# Altium PCB PCB2.PcbDoc
Units mm, origin at the board's own origin, x right, y up, seen from the top; angles counter-clockwise.
Board outline 200 x 200 mm, 2 copper layers (Top Layer, Bottom Layer); 133 components, 113 nets, 472 pads, 0 vias.
Unrouted connection lines stored in the file: 316.
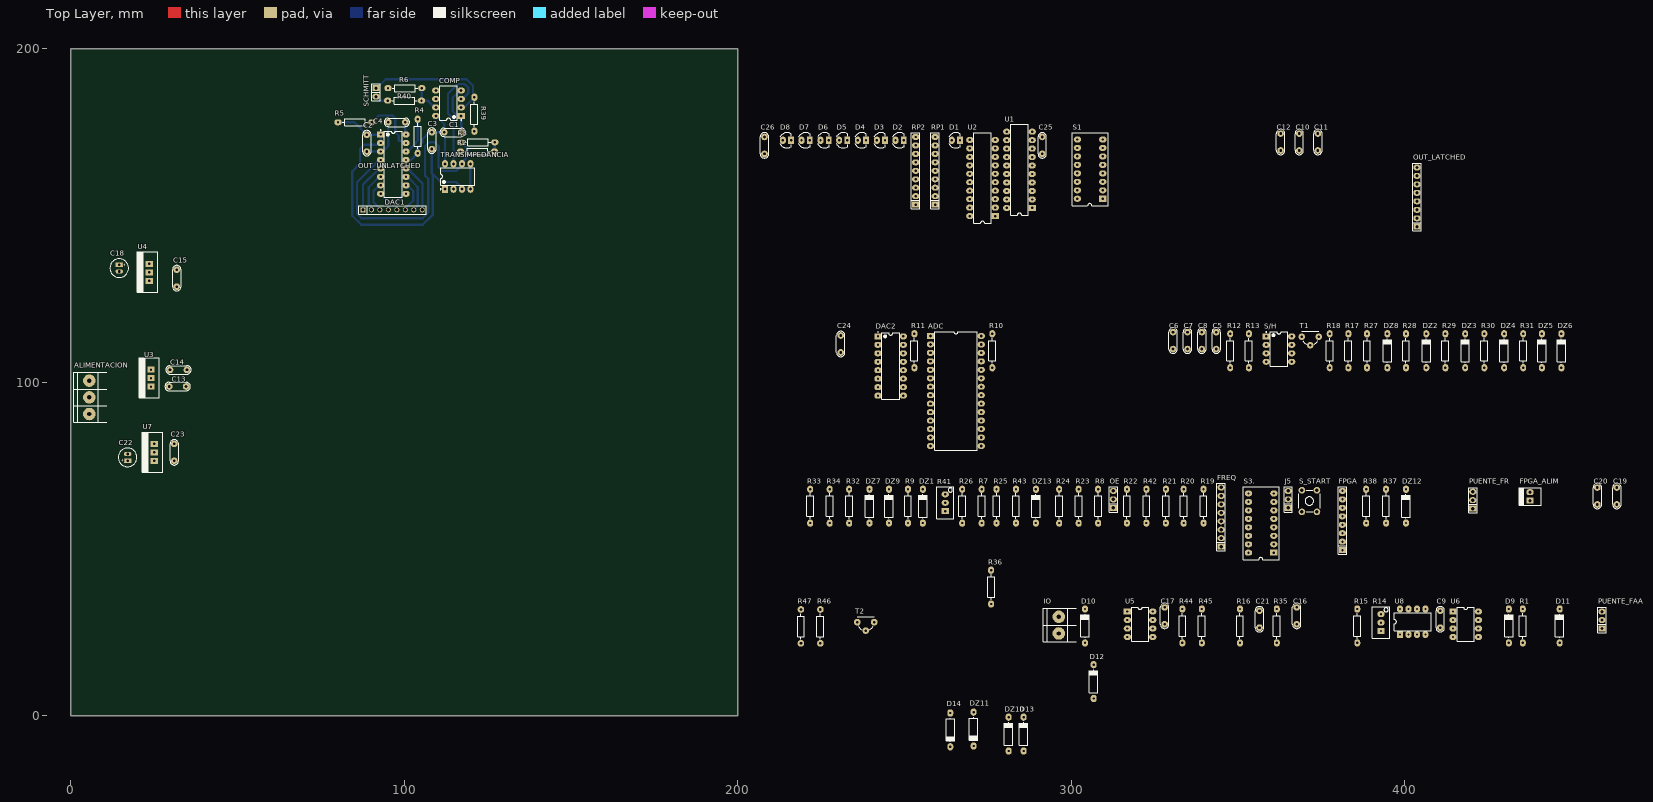
[diagram p0: Top Layer view]
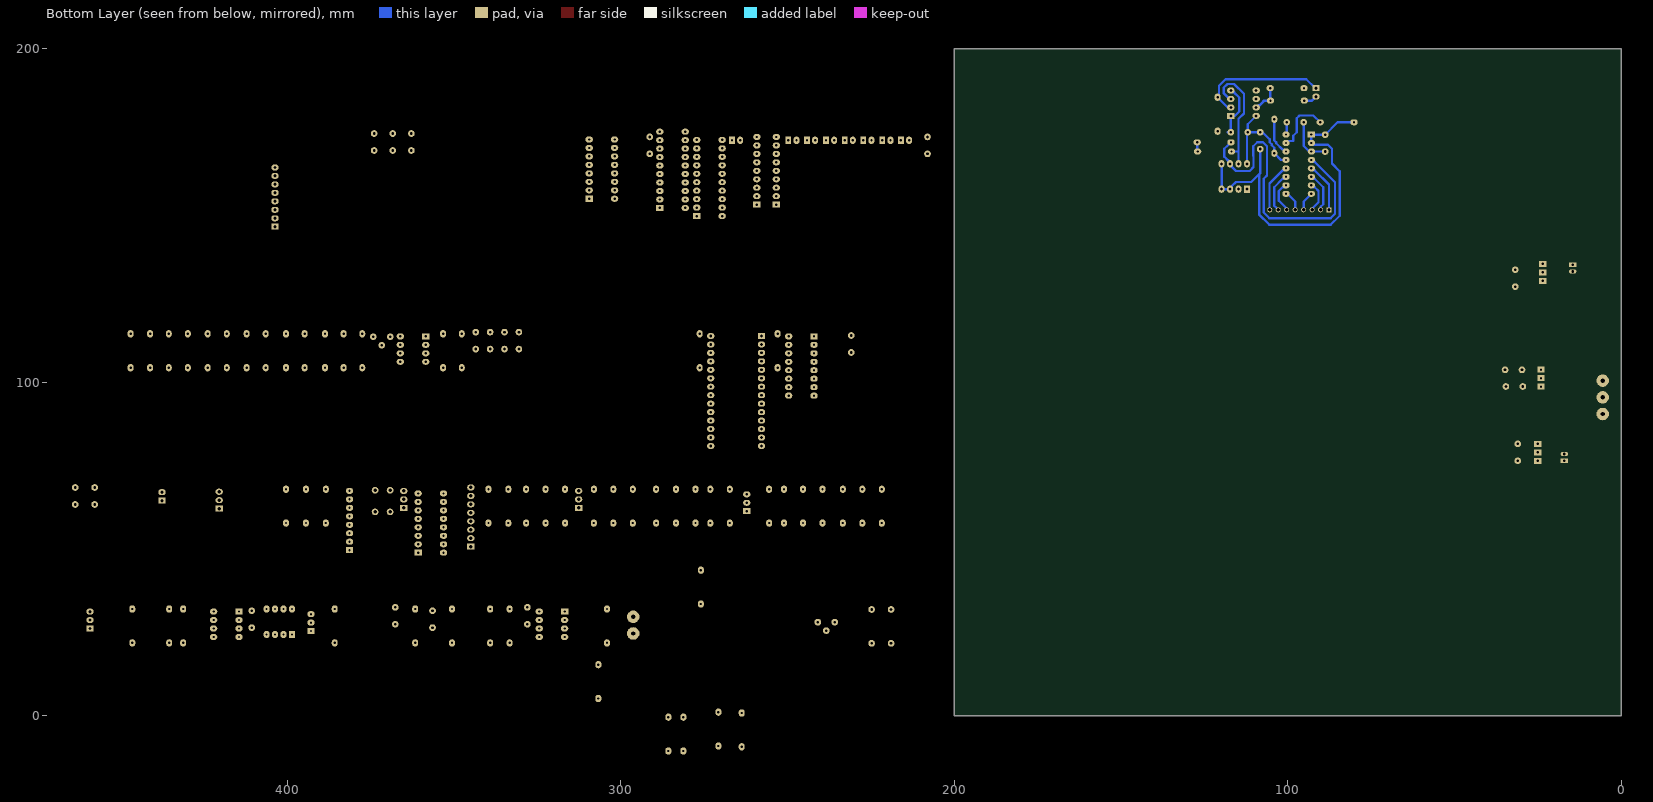
[diagram p1: Bottom Layer view, seen from below]

## Layer stack, top to bottom
Top Solder: solder mask 0.0102, Solder Resist, Dk 3.5
Top Layer: signal copper 0.0356
Dielectric 1: dielectric 0.32, FR-4, Dk 4.8
Bottom Layer: signal copper 0.0356
Bottom Solder: solder mask 0.0102, Solder Resist, Dk 3.5

## Board outline
0,0 0,200 200,200 200,0 0,0

## Design rules (kind name [scope] priority, off if disabled: settings)
Clearance [All] p1: gap=0.7 ignorepadtopadclearanceinfootprint=FALSE except(0: Arc-Hole Track-Hole SMDPad-Hole THPad-Hole Via-Hole Fill-Hole Poly-Hole Region-Hole Text-Hole)
PolygonConnect [All] p1: connectstyle=Relief reliefconductorwidth=0.254 reliefentries=4 polygonreliefangle="90 Angle" airgapwidth=0.254
RoutingVias [All] p1: holewidth=0.7 width=1.8 viastyle="Through Hole" minholewidth=0.7 minwidth=1.8 maxholewidth=0.7 maxwidth=1.8
SolderMaskExpansion [All] p1: expansion=0.102
Width [All] p1: maxlimit=0.7 minlimit=0.7 preferedwidth=0.7
30 further rules are at their usual default settings.

## Components (designator, comment, footprint, x,y, rotation, side; value= is the part's Value field where it differs from the comment)
ADC "ADC0808CCN" DIP28 257.81,113.919 r0 top
ALIMENTACION "BORNERA 3" BORNERA3 5.5,95.5 r0 top
C1 "100n" CAP200 114.5,175 r0 top
C2 "100n" CAP200 88.75,171.75 r270 top
C3 "100n" CAP200 108.25,172.5 r90 top
C4 "10n" CAP200 97.75,178 r0 top
C5 "100n" CAP200 343.535,112.522 r90 top
C6 "100n" CAP200 330.581,112.522 r90 top
C7 "100n" CAP200 334.899,112.522 r90 top
C8 "10n" CAP200 339.217,112.522 r90 top
C9 "CAP" CAP200 410.718,28.956 r90 top
C10 "10n" CAP200 368.427,172.085 r90 top
C11 "100n" CAP200 374.015,172.085 r90 top
C12 "100n" CAP200 362.839,172.085 r90 top
C13 "330n" CAP200 32,98.75 r0 top
C14 "100n" CAP200 32.25,103.75 r0 top
C15 "100n" CAP200 31.75,131.25 r90 top
C16 "100n" CAP200 367.665,29.972 r90 top
C17 "100n" CAP200 328.041,29.972 r90 top
C18 "10u" CAP100RP 14.5,134.25 r270 top
C19 "100n" CAP200 463.677,65.913 r90 top
C20 "100n" CAP200 457.835,65.913 r90 top
C21 "CAP" CAP200 356.489,28.956 r90 top
C22 "2.2u" CAP100RP 17,77.5 r90 top
C23 "1u" CAP200 31,79 r270 top
C24 "100n" CAP200 230.886,111.506 r90 top
C25 "CAP" CAP200 291.338,171.069 r90 top
C26 "CAP" CAP200 208.026,171.069 r90 top
COMP "LM311N" N08E#1 113.25,183.75 r180 top
D1 "LED" LED3 265.43,172.593 r0 top
D2 "LED" LED3 248.539,172.593 r0 top
D3 "LED" LED3 242.951,172.593 r0 top
D4 "LED" LED3 237.236,172.593 r0 top
D5 "LED" LED3 231.648,172.593 r0 top
D6 "LED" LED3 226.06,172.593 r0 top
D7 "LED" LED3 220.345,172.593 r0 top
D8 "LED" LED3 214.757,172.593 r0 top
D9 "DIODO" DO41 431.292,26.924 r90 top
D10 "DIODO" DO41 304.165,26.924 r90 top
D11 "DIODO" DO41 446.532,26.924 r90 top
D12 "DIODO" DO41 306.75,10.25 r90 top
D13 "DIODO" DO41 285.75,-5.5 r90 top
D14 "DIODO" DO41 263.75,-4.25 r270 top
DAC1 "DAC0800LCN" N16E 96.69,165.44 r0 top
DAC2 "DAC0800LCN" N16E 245.872,104.902 r0 top
DZ1 "3.3V" DO41 255.524,62.865 r90 top
DZ2 "3.6V" DO41 406.527,109.474 r90 top
DZ3 "3.6V" DO41 418.211,109.474 r90 top
DZ4 "3.6V" DO41 429.895,109.474 r90 top
DZ5 "3.6V" DO41 441.198,109.474 r90 top
DZ6 "3.6V" DO41 447.04,109.474 r90 top
DZ7 "3.6V" DO41 239.522,62.865 r90 top
DZ8 "3.6V" DO41 394.843,109.474 r90 top
DZ9 "3.6V" DO41 245.364,62.865 r90 top
DZ10 "5.6V" DO41 281.25,-5.5 r90 top
DZ11 "5.6V" DO41 270.75,-4 r270 top
DZ12 "3.6V" DO41 400.431,62.865 r90 top
DZ13 "3.6V" DO41 289.433,62.865 r90 top
FPGA "CON8" SIP8#1 381.381,49.657 r90 top
FPGA_ALIM "MOLEX2" MOLEX2 437.642,64.516 r90 top
FREQ "CON8" SIP8#2 345,50.71 r90 top
IO "BORNERA 2" BORNERA2 296.291,27.178 r0 top
J5 "SAR/MOD" JUMPER3 365.125,64.897 r90 top
OE "JUMPER" JUMPER3 312.674,64.897 r90 top
OUT_LATCHED "CON8" SIP8#2 403.75,146.67 r90 top
OUT_UNLATCHED "CON8" SIP8#3 87.59,151.75 r0 top
PUENTE_FAA "JUMPER" JUMPER3 459.232,28.702 r90 top
PUENTE_FR "JUMPER" JUMPER3 420.497,64.643 r90 top
R1 "4k7" RES400#1 435.483,21.844 r90 top
R2 "1K5" RES400#1 116.84,169.25 r0 top
R3 "1K" RES400#1 127.16,172 r180 top
R4 "5K" RES400#1 104,178.91 r270 top
R5 "5K" RES400#1 90.25,178 r180 top
R6 "1K" RES400#1 105.25,188.25 r180 top
R7 "560" RES400#1 273.177,57.785 r90 top
R8 "1K" RES400#1 308.102,57.785 r90 top
R9 "1K" RES400#1 251.079,57.785 r90 top
R10 "5K" RES400#1 276.352,104.394 r90 top
R11 "5K" RES400#1 252.984,104.394 r90 top
R12 "1K" RES400#1 347.726,104.394 r90 top
R13 "1k5" RES400#1 353.314,104.394 r90 top
R14 "10k" "PRESET V" 392.938,27.94 r90 top
R15 "4k7" RES400#1 385.826,21.844 r90 top
R16 "4k7" RES400#1 350.647,21.844 r90 top
R17 "2k2" RES400#1 383.159,104.394 r90 top
R18 "6k8" RES400#1 377.571,104.394 r90 top
R19 "10k" RES400#1 339.725,57.785 r90 top
R20 "10k" RES400#1 333.756,57.785 r90 top
R21 "10k" RES400#1 328.422,57.785 r90 top
R22 "10k" RES400#1 316.738,57.785 r90 top
R23 "10k" RES400#1 302.26,57.785 r90 top
R24 "10k" RES400#1 296.418,57.785 r90 top
R25 "10k" RES400#1 277.622,57.785 r90 top
R26 "10k" RES400#1 267.335,57.785 r90 top
R27 "22k" RES400#1 388.747,104.394 r90 top
R28 "22k" RES400#1 400.431,104.394 r90 top
R29 "22k" RES400#1 412.242,104.394 r90 top
R30 "22k" RES400#1 423.926,104.394 r90 top
R31 "22k" RES400#1 435.61,104.394 r90 top
R32 "22k" RES400#1 233.426,57.785 r90 top
R33 "22k" RES400#1 221.742,57.785 r90 top
R34 "22k" RES400#1 227.584,57.785 r90 top
R35 "10k" RES400#1 361.696,21.844 r90 top
R36 "10k" RES400#1 276,33.5 r90 top
R37 "20k" RES400#1 394.462,57.785 r90 top
R38 "10k" RES400#1 388.493,57.785 r90 top
R39 "TBD" RES400#1 121,175.34 r90 top
R40 "TBD" RES400#1 95,184.5 r0 top
R41 "PRESET" "PRESET V" 262.255,63.881 r90 top
R42 "10K" RES400#1 322.58,57.785 r90 top
R43 "20K" RES400#1 283.464,57.785 r90 top
R44 "4k7" RES400#1 333.375,21.844 r90 top
R45 "4k7" RES400#1 339.217,21.844 r90 top
R46 "2k2" RES400#2 224.79,21.717 r90 top
R47 "6k8" RES400#2 218.948,21.717 r90 top
RP1 "R-PACK 8+1" RESNET8+1 259.207,153.289 r90 top
RP2 "R-PACK 8+1" RESNET8+1 253.365,153.289 r90 top
S1 "SW-DIP8" DIP-16-KEY 309.499,155.067 r90 top
S3. "SW-DIP8" DIP-16-KEY 360.807,48.895 r90 top
S/H "LF398N" N08E#2 362.331,109.982 r0 top
S_START "TACT SWITCH" TACTSWITCH 371.475,64.389 r0 top
SCHMITT "JUMPER" JUMPER2 91.5,186.98 r270 top
T1 "TRANSISTOR NPN" TO92 371.729,112.395 r0 top
T2 "TRANSISTOR NPN" TO92 238.379,26.797 r0 top
TRANSIMPEDANCIA "LM358N" N08E#1 116,161.75 r90 top
U1 "SN74LS244N" 738-03 284.5,163.75 r90 top
U2 "MC74HC374N" 738-03 273.431,161.29 r90 top
U3 "7805" "TO-220 V" 24,101.25 r90 top
U4 "MC33269" "TO-220 V" 23.5,133 r90 top
U5 "MAX297CPA" DIP8 316.865,31.242 r0 top
U6 "MAX297CPA" DIP8 414.528,31.242 r0 top
U7 "7905" "TO-220 V" 25,79 r90 top
U8 "TL082ACJG" 693-02 402.463,28.194 r0 top

## Footprints (in the part's own frame and the unit in brackets; to place one, negate y for a bottom-side part, rotate by r counter-clockwise, add the part's x,y. Pads: shape width x height; smd on the part's side, far side on the other; paste and mask are expansions set on the pad)
693-02 [mm] "DIP; 8 Leads; Row Spacing 7.62 mm; Pitch 2.54 mm"
  rect 1.8x2.2 hole 0.7: 1(-3.81,-3.81)
  oval 1.8x2.2 hole 0.7: 2(-1.27,-3.81) 3(1.27,-3.81) 4(3.81,-3.81) 5(3.81,3.81) 6(1.27,3.81) 7(-1.27,3.81) 8(-3.81,3.81)
  silkscreen extent -5.5,-2.65 5.5,2.65
738-03 [mm] "DIP; 20 Leads; Row Spacing 7.62 mm; Pitch 2.54 mm"
  rect 1.8x2.2 hole 0.7: 1(-11.43,-3.81)
  oval 1.8x2.2 hole 0.7: 2(-8.89,-3.81) 3(-6.35,-3.81) 4(-3.81,-3.81) 5(-1.27,-3.81) 6(1.27,-3.81) 7(3.81,-3.81) 8(6.35,-3.81) 9(8.89,-3.81) 10(11.43,-3.81) 11(11.43,3.81) 12(8.89,3.81) 13(6.35,3.81) 14(3.81,3.81) 15(1.27,3.81) 16(-1.27,3.81) 17(-3.81,3.81) 18(-6.35,3.81) 19(-8.89,3.81) 20(-11.43,3.81)
  silkscreen extent -13.6,-2.65 13.6,2.65
BORNERA2 [mm] "Bornera con Tornillos 5mm separación"
  round 3.75 hole 1.3: 1(0,2.5) 2(0,-2.5)
  silkscreen extent -4.6,-5 5.2,5, body extent -3.76,-4.89 3.94,5.61, height 10
BORNERA3 [mm] "Bornera con Tornillos 5mm separación"
  round 3.75 hole 1.3: 1(0,5) 2(0,0) 3(0,-5)
  silkscreen extent -4.6,-7.5 5.2,7.5, body extent -3.76,-7.39 3.94,8.11, height 10.05
CAP100RP [mm] "Body diameter 5mm"
  rect 1.3x2.2 hole 0.762: 1(-1,0)
  oval 1.3x2.2 hole 0.762: 2(1,0)
  silkscreen extent -2.79,-2.79 2.79,2.79, body extent -2.53,-2.51 2.53,2.54, height 11.53
CAP200 [mm]
  round 2 hole 0.813: 1(-2.54,0) 2(2.54,0)
  silkscreen extent -3.81,-1.27 3.81,1.27, body extent -2.79,-1.17 2.79,1.12, height 6.24
DIP8 [mm]
  rect 2.2x1.8 hole 0.7: 1(0,0)
  oval 2.2x1.8 hole 0.7: 2(0,-2.54) 3(0,-5.08) 4(0,-7.62) 5(7.62,-7.62) 6(7.62,-5.08) 7(7.62,-2.54) 8(7.62,0)
  silkscreen extent 1.27,-8.89 6.35,1.27, body extent -0.06,-9.21 7.7,1.59, height 4.5
DIP28 [mm]
  rect 2.2x1.8 hole 0.813: 1(0,0)
  oval 2.2x1.8 hole 0.813: 2(0,-2.54) 3(0,-5.08) 4(0,-7.62) 5(0,-10.16) 6(0,-12.7) 7(0,-15.24) 8(0,-17.78) 9(0,-20.32) 10(0,-22.86) 11(0,-25.4) 12(0,-27.94) 13(0,-30.48) 14(0,-33.02) 15(15.24,-33.02) 16(15.24,-30.48) 17(15.24,-27.94) 18(15.24,-25.4) 19(15.24,-22.86) 20(15.24,-20.32) 21(15.24,-17.78) 22(15.24,-15.24) 23(15.24,-12.7) 24(15.24,-10.16) 25(15.24,-7.62) 26(15.24,-5.08) 27(15.24,-2.54) 28(15.24,0)
  silkscreen extent 1.27,-34.29 13.97,1.27, body extent -0.19,-34.54 15.43,1.47, height 4.66
DIP-16-KEY [mm] "DIP; 16 Leads; Row Spacing 7.62 mm; Pitch 2.54 mm"
  rect 1.8x2.2 hole 0.7: 1(0,0)
  oval 1.8x2.2 hole 0.7: 2(2.54,0) 3(5.08,0) 4(7.62,0) 5(10.16,0) 6(12.7,0) 7(15.24,0) 8(17.78,0) 9(17.78,7.62) 10(15.24,7.62) 11(12.7,7.62) 12(10.16,7.62) 13(7.62,7.62) 14(5.08,7.62) 15(2.54,7.62) 16(0,7.62)
  silkscreen extent -2.05,-1.59 19.83,9.2
DO41 [mm]
  oval 2.2x1.8 hole 0.7: 1(-5.08,0) 2(5.08,0)
  silkscreen extent -3.56,-1.27 3.56,1.27, body extent -5.46,-1.19 5.46,1.37, height 2.03
JUMPER2 [mm]
  rect 1.8x2.2 hole 1.016: 1(-1.27,0)
  oval 1.8x2.2 hole 1.016: 2(1.27,0)
  silkscreen extent -2.54,-1.27 2.54,1.27, body extent -2.46,-1.27 2.54,1.27, height 9.5
JUMPER3 [mm]
  rect 1.8x2.2 hole 1.016: 1(-2.54,0)
  oval 1.8x2.2 hole 1.016: 2(0,0) 3(2.54,0)
  silkscreen extent -3.81,-1.27 3.81,1.27, body extent -3.81,-1.3 3.81,1.27, height 16.15
LED3 [mm]
  oval 1.8x2.2 hole 0.7: 1(-1.219,0)
  rect 1.7x2.2 hole 0.7: 2(1.245,0)
  silkscreen extent -2.13,-2.3 1.36,2.3, body extent -1.65,-1.63 1.65,1.66, height 0.49
MOLEX2 [mm]
  rect 1.8x2.2 hole 1.016: 1(0,0)
  oval 1.8x2.2 hole 1.016: 2(2.54,0)
  silkscreen extent -1.4,-3.3 3.94,3.3, body extent -1.27,-3.17 3.81,3.18, height 10.74
N08E#1 [mm] "DIP, 8-Leads, Row Spacing 7.62mm, Pitch 2.54mm, Body 9.91x6.35mm"
  rect 2.2x1.8 hole 0.9: 1(-3.81,3.81)
  oval 2.2x1.8 hole 0.9: 2(-3.81,1.27) 3(-3.81,-1.27) 4(-3.81,-3.81) 5(3.81,-3.81) 6(3.81,-1.27) 7(3.81,1.27) 8(3.81,3.81)
  silkscreen extent -3.94,-5.15 2.65,5.23, body extent -3.6,-5.15 3.6,5.15, height 5.34
N08E#2 [mm] "DIP, 8-Leads, Row Spacing 7.62mm, Pitch 2.54mm, Body 9.91x6.35mm"
  rect 2.2x1.8 hole 0.7: 1(-3.81,3.81)
  oval 2.2x1.8 hole 0.7: 2(-3.81,1.27) 3(-3.81,-1.27) 4(-3.81,-3.81) 5(3.81,-3.81) 6(3.81,-1.27) 7(3.81,1.27) 8(3.81,3.81)
  silkscreen extent -3.93,-5.15 2.65,5.23, body extent -3.6,-5.15 3.6,5.15, height 5.34
N16E [mm] "DIP, 16-Leads, Row Spacing 7.62mm, Pitch 2.54mm, Body 19.3x6.35mm"
  rect 2.2x1.8 hole 0.7: 1(-3.81,8.89)
  oval 2.2x1.8 hole 0.7: 2(-3.81,6.35) 3(-3.81,3.81) 4(-3.81,1.27) 5(-3.81,-1.27) 6(-3.81,-3.81) 7(-3.81,-6.35) 8(-3.81,-8.89) 9(3.81,-8.89) 10(3.81,-6.35) 11(3.81,-3.81) 12(3.81,-1.27) 13(3.81,1.27) 14(3.81,3.81) 15(3.81,6.35) 16(3.81,8.89)
  silkscreen extent -3.93,-9.9 2.65,10.31, body extent -3.3,-9.9 3.3,9.9, height 4.32
"PRESET V" [mm]
  rect 1.8x2.2 hole 0.7: 1(-2.54,0)
  oval 1.8x2.2 hole 0.7: 2(0,0) 3(2.54,0)
  silkscreen extent -4.76,-2.6 4.76,2.6, body extent -4.7,-2.42 4.83,2.42, height 11.55
RES400#1 [mm]
  oval 2.2x1.8 hole 0.7: 1(0,0) 2(10.16,0)
  silkscreen extent 1.27,-1.02 8.89,1.02, body extent -0.3,-1.14 10.46,1.17, height 2.43
RES400#2 [mm]
  round 2 hole 0.813: 1(0,0) 2(10.16,0)
  silkscreen extent 1.27,-1.02 8.89,1.02, body extent -0.3,-1.14 10.46,1.17, height 2.43
RESNET8+1 [mm]
  rect 1.8x2.2 hole 0.7: 1(0,0)
  oval 1.8x2.2 hole 0.7: 2(2.54,0) 3(5.08,0) 4(7.62,0) 5(10.16,0) 6(12.7,0) 7(15.24,0) 8(17.78,0) 9(20.32,0)
  silkscreen extent -1.27,-1.27 21.59,1.27, body extent -1.09,-0.64 21.41,0.62, height 5.3
SIP8#1 [mm]
  rect 1.8x2.2 hole 0.7: 1(0,0)
  oval 1.8x2.2 hole 0.7: 2(2.54,0) 3(5.08,0) 4(7.62,0) 5(10.16,0) 6(12.7,0) 7(15.24,0) 8(17.78,0)
  silkscreen extent -1.27,-1.27 19.05,1.27, body extent -1.27,-1.27 19.05,1.27, height 8.38
SIP8#2 [mm]
  rect 1.8x2.2 hole 1.016: 1(0,0)
  oval 1.8x2.2 hole 1.016: 2(2.54,0) 3(5.08,0) 4(7.62,0) 5(10.16,0) 6(12.7,0) 7(15.24,0) 8(17.78,0)
  silkscreen extent -1.27,-1.27 19.05,1.27, body extent -1.27,-1.27 19.05,1.27, height 8.38
SIP8#3 [mm]
  rect 1.5x1.5 hole 1.016: 1(0,0)
  round 1.5 hole 1.016: 2(2.54,0) 3(5.08,0) 4(7.62,0) 5(10.16,0) 6(12.7,0) 7(15.24,0) 8(17.78,0)
  silkscreen extent -1.27,-1.27 19.05,1.27, body extent -1.27,-1.27 19.05,1.27, height 8.38
TACTSWITCH [mm]
  round 2 hole 1.016: 1(-2.25,-3.25) 2(-2.25,3.25) 3(2.25,-3.25) 4(2.25,3.25)
  silkscreen extent -3.25,-3.25 3.25,3.25, body extent -3.05,-3.95 3.15,3.95, height 7
TO92 [mm]
  round 2 hole 0.813: 1(0,-1.27) 2(2.54,1.27) 3(-2.54,1.27)
  silkscreen extent -2.54,-1 2.54,2.92, body extent -2.79,-1.55 2.79,2.79, height 8
"TO-220 V" [mm]
  rect 1.8x2.2 hole 0.7: 1(-2.54,0) 2(0,0) 3(2.54,0)
  silkscreen extent -5.9,-2.54 6.1,3.54, body extent -5,-2 5,3, height 18

## Part data
ADC: "28 pin 8-bit Microprocessor Compatible A/D Converters With 8-Channel Multiplexer 13 per tube"
C1 C2 C3 C4 C5 C6 C7 C8 C10 C11 C12 C13 C14 C15 C16 C17 C19 C20 C23 C24: library part CAP
C18 C22: library part CAPPOL
COMP: "Voltage Comparator, 8-pin MDIP"
DAC1 DAC2: "8-Bit D/A Converter, 16-pin MDIP"
DZ1 DZ2 DZ3 DZ4 DZ5 DZ6 DZ7 DZ8 DZ9 DZ10 DZ11 DZ12 DZ13: library part "DIODO ZENER"
J5 OE PUENTE_FAA PUENTE_FR: library part JUMPER3
R1 R2 R3 R4 R5 R6 R7 R8 R9 R10 R11 R12 R13 R15 R16 R17 R18 R19 R20 R21 R22 R23 R24 R25 R26 R27 R28 R29 R30 R31 R32 R33 R34 R35 R36 R37 R38 R39 R40 R42 R43 R44 R45 R46 R47: library part RES
R14: library part PRESET
S1 S3.: "4009 Series DIP Switch, Raised actuator"
S/H: "Monolithic Sample and Hold Circuits, 8-pin MDIP"
TRANSIMPEDANCIA: "Low Power Dual Operational Amplifier, 8-pin MDIP"
U1: "Octal Buffer/Line Driver with 3-State Outputs"
U2: "Octal 3-State Non-Inverting D-Type Flip-Flop"
U3 U4: library part 78XX, "REGULDOR POSITIVO"
U5 U6: "Active Filter Single SW-CAP Low Pass 8th Order 50kHz 8-Pin PDIP N"
U7: library part 79XX, "REGULADOR NEGATIVO"
U8: "JFET-Input Operational Amplifier"

## Nets (pads, with @x,y where several pads share a name; then routed paths per layer and width w, separated by ;. In a path a pad name is that pad's centre, name@x,y a point inside that pad or via, vN(x,y) a via of type N, cw(c..) or ccw(c..) an arc to the next point about the centre after c; other vN are vias at no path point)
B0: DAC2.5 DAC2.12 RP1.2 RP1.9 S1.9 S1.16 U1.2 U1.17
B1: DAC2.11 RP1.3 S1.10 U1.15
B2: DAC2.10 RP1.4 S1.11 U1.13
B3: DAC2.9 RP1.5 S1.12 U1.11
B4: DAC2.8 RP1.6 S1.13 U1.8
B5: DAC2.7 RP1.7 S1.14 U1.6
B6: DAC2.6 RP1.8 S1.15 U1.4
CLK_9FS: FPGA.6 T1.3
CLK_DAC: ADC.10 R18.1 T1.2
CLK_FILTRO: FPGA.7 T2.3
FPGA_OE: DZ1.2 R7.1 R38.1 U2.1
FR_IN: D10.2 D12.1 PUENTE_FR.1 R13.2 TRANSIMPEDANCIA.1 U5.8
GND: ADC.1 ADC.2 ADC.3 ADC.4 ADC.5 ADC.13 ADC.16 ADC.23 ADC.24 ADC.25 ADC.27 ADC.28 ALIMENTACION.2 C1.2 C2.1 C3.1 C5.2 C6.2 C7.2 C8.2 C9.2 C11.1 C12.1 C13.2 C14.2 C15.2 C16.2 C17.1 C18.2 C19.2 C20.2 C21.2 C22.1 C23.2 C24.2 C25.1 C26.2 COMP.1 COMP.4 D9.1 D10.1 D13.1 D14.2 DAC1.1 DAC1.2 DAC2.1 DAC2.2 DZ1.1 DZ2.1 DZ3.1 DZ4.1 DZ5.1 DZ6.1 DZ7.1 DZ8.1 DZ9.1 DZ10.1 DZ11.2 DZ12.1 DZ13.1 FPGA_ALIM.2 J5.1 R5.2 R8.1 R9.1 R11.1 R16.2 R27.1 R28.1 R29.1 R30.1 R31.1 R32.1 R33.1 R34.1 R35.1 R36.1 R37.2 R41.1 R43.1 R45.2 RP1.1 RP2.1 S/H.7 TRANSIMPEDANCIA.3 TRANSIMPEDANCIA.4 TRANSIMPEDANCIA.5 U1.1 U1.10 U1.19 U2.10 U3.2 U4.2 U5.6 U6.6 U7.1 | length 129.9
  Bottom Layer w0.7: R5.2 85.04,178 C2.1 92.84,174.29 DAC1.1 DAC1.2 92.29,171.2 92.29,171.26 87.901,171.26 86.7,170.059 86.7,165.61 84.42,163.33 84.39,163.36 84.39,149.985 87.125,147.25 105.48,147.25 108.57,150.34 108.57,161.66 108.5,161.73 108.5,162.5 ; C3.1 108.25,162.75 108.5,162.5 ; COMP.4 116.47,186.97 116.052,186.97 114.5,185.418 114.5,181.25 115.81,179.94 COMP.1 117.04,179.92 C1.2 C1.2@118,175 ; TRANSIMPEDANCIA.5 TRANSIMPEDANCIA.4 TRANSIMPEDANCIA.3 117.27,158.358 116.852,157.94 116.68,157.94 116.68,158.948 115.538,160.09 110.91,160.09 108.5,162.5
NetADC_8: ADC.8 U2.13
NetADC_14: ADC.14 U2.17
NetADC_15: ADC.15 U2.14
NetADC_17: ADC.17 U2.18
NetADC_18: ADC.18 U2.8
NetADC_19: ADC.19 U2.7
NetADC_20: ADC.20 U2.4
NetADC_21: ADC.21 U2.3
NetC4_2: C4.2 DAC1.16 | length 3.8
  Bottom Layer w0.7: C4.2 100.29,174.54 DAC1.16
NetC8_1: C8.1 S/H.6
NetC10_1: C10.1 DAC2.16
NetCOMP_2: COMP.2 R39.2 SCHMITT.1 | length 39.9
  Bottom Layer w0.7: SCHMITT.1 91.75,188.25 94.41,190.91 118.648,190.91 120.61,188.948 120.61,185.89 R39.2 117.98,182.48 COMP.2 COMP.2@117.08,182.5
NetCOMP_3: COMP.3 R2.1 TRANSIMPEDANCIA.7 | length 36.6
  Bottom Layer w0.7: TRANSIMPEDANCIA.7@114.73,165.02 TRANSIMPEDANCIA.7 114.73,169.25 ; R2.1 114.73,169.25 ; COMP.3 117.478,185.02 119.21,186.752 119.21,188.368 118.068,189.51 116.052,189.51 113.1,186.558 113.1,180.67 114.73,179.04 114.73,169.25
NetD1_1: D1.1 U1.18
NetD1_2: D1.2 RP2.9
NetD2_1: D2.1 U1.16
NetD2_2: D2.2 RP2.8
NetD3_1: D3.1 U1.14
NetD3_2: D3.2 RP2.7
NetD4_1: D4.1 U1.12
NetD4_2: D4.2 RP2.6
NetD5_1: D5.1 U1.9
NetD5_2: D5.2 RP2.5
NetD6_1: D6.1 U1.7
NetD6_2: D6.2 RP2.4
NetD7_1: D7.1 U1.5
NetD7_2: D7.2 RP2.3
NetD8_1: D8.1 U1.3
NetD8_2: D8.2 RP2.2
NetD9_2: D9.2 D11.1 PUENTE_FAA.3 R1.2 U6.8 U8.7
NetDAC1_4: DAC1.4 R3.2 TRANSIMPEDANCIA.6 | length 90.6
  Bottom Layer w0.7: DAC1.4 92.88,166.12 91.872,166.12 85.79,160.038 85.79,150.565 87.105,149.25 105.5,149.25 107.17,150.92 107.17,161.08 106.2,162.05 106.2,170.809 107.401,172.01 109.099,172.01 110.3,170.809 110.3,167.92 110.24,167.86 110.24,164.552 111.382,163.41 115.538,163.41 116.68,164.552 116.68,164.97 TRANSIMPEDANCIA.6 117.86,166.15 117.86,166.568 119,167.708 119,170.048 117.848,171.2 117.8,171.2 R3.2
NetDAC1_5: DAC1.5 OUT_UNLATCHED.1 | length 14.9
  Bottom Layer w0.7: OUT_UNLATCHED.1 87.59,159.298 91.872,163.58 92.29,163.58 DAC1.5
NetDAC1_6: DAC1.6 OUT_UNLATCHED.2 | length 11.9
  Bottom Layer w0.7: OUT_UNLATCHED.2 90.13,152.64 89.33,153.44 89.33,158.498 91.872,161.04 92.29,161.04 DAC1.6
NetDAC1_7: DAC1.7 OUT_UNLATCHED.3 | length 9.3
  Bottom Layer w0.7: OUT_UNLATCHED.3 92.67,152.08 90.75,154 90.75,155.702 90.73,155.722 90.73,157.358 91.872,158.5 92.29,158.5 DAC1.7
NetDAC1_8: DAC1.8 OUT_UNLATCHED.4 | length 5.8
  Bottom Layer w0.7: DAC1.8 95.18,154.25 95.18,151.78 OUT_UNLATCHED.4
NetDAC1_9: DAC1.9 OUT_UNLATCHED.5 | length 6.2
  Bottom Layer w0.7: OUT_UNLATCHED.5 97.75,154.25 100.05,156.55 DAC1.9
NetDAC1_10: DAC1.10 OUT_UNLATCHED.6 | length 9.8
  Bottom Layer w0.7: OUT_UNLATCHED.6 100.29,152.14 102.65,154.5 102.65,157.358 101.508,158.5 100.5,158.5 DAC1.10
NetDAC1_11: DAC1.11 OUT_UNLATCHED.7 | length 12.1
  Bottom Layer w0.7: DAC1.11 101.09,161.04 101.508,161.04 104.05,158.498 104.05,152.976 103.57,152.496 103.57,152.49 OUT_UNLATCHED.7
NetDAC1_12: DAC1.12 OUT_UNLATCHED.8 | length 14.7
  Bottom Layer w0.7: DAC1.12 101.09,163.58 101.508,163.58 105.45,159.638 105.45,151.83 OUT_UNLATCHED.8
NetDAC1_14: DAC1.14 R4.1 | length 11.4
  Bottom Layer w0.7: DAC1.14 101.09,169.84 101.508,169.84 103.4,171.732 103.4,171.969 104,172.569 R4.1
NetDAC1_15: DAC1.15 R5.1 | length 17.9
  Bottom Layer w0.7: R5.1 92.3,180.05 96.45,180.05 97.26,179.24 97.26,175.03 98.35,173.94 98.35,172.38 99.91,172.38 DAC1.15
NetDAC2_4: DAC2.4 R12.1 TRANSIMPEDANCIA.2
NetDAC2_14: DAC2.14 R10.2
NetDAC2_15: DAC2.15 R11.2
NetDZ2_2: DZ2.2 FREQ.5 R23.2 R28.2
NetDZ3_2: DZ3.2 FREQ.2 R20.2 R29.2
NetDZ4_2: DZ4.2 FREQ.6 R24.2 R30.2
NetDZ5_2: DZ5.2 FREQ.3 R21.2 R31.2
NetDZ6_2: DZ6.2 FREQ.7 R25.2 R32.2
NetDZ7_2: DZ7.2 FREQ.4 R22.2 R33.2
NetDZ8_2: DZ8.2 FREQ.1 R19.2 R27.2
NetDZ9_2: DZ9.2 FREQ.8 R26.2 R34.2
NetDZ12_2: DZ12.2 FPGA.2 R37.1 R38.2
NetDZ13_2: DZ13.2 FPGA.4 R42.2 R43.2
NetFPGA_3: FPGA.3 J5.2
NetFPGA_8: FPGA.8 R41.2
NetIO_1: IO.1 R44.1
NetIO_2: IO.2 PUENTE_FR.2
NetOE_3: OE.3 R7.2 R8.2
NetOUT_LATCHED_1: OUT_LATCHED.1 S1.1 U2.2
NetOUT_LATCHED_2: OUT_LATCHED.2 S1.2 U2.5
NetOUT_LATCHED_3: OUT_LATCHED.3 S1.3 U2.6
NetOUT_LATCHED_4: OUT_LATCHED.4 S1.4 U2.9
NetOUT_LATCHED_5: OUT_LATCHED.5 S1.5 U2.12
NetOUT_LATCHED_6: OUT_LATCHED.6 S1.6 U2.15
NetOUT_LATCHED_7: OUT_LATCHED.7 S1.7 U2.16
NetOUT_LATCHED_8: OUT_LATCHED.8 S1.8 U2.19
NetPUENTE_FAA_1: PUENTE_FAA.1 U6.5
NetPUENTE_FR_3: PUENTE_FR.3 U5.5
NetR1_1: R1.1 R15.2 U8.6
NetR2_2: R2.2 R3.1 | length 2.8
  Bottom Layer w0.7: R2.2 127.16,169.41 R3.1
NetR12_2: R12.2 R13.1
NetR14_1: R14.1 R16.1 U8.3
NetR15_1: R15.1 U8.1 U8.2
NetR17_1: R17.1 T1.1
NetR19_1: R19.1 S3..16
NetR20_1: R20.1 S3..15
NetR21_1: R21.1 S3..14
NetR22_1: R22.1 S3..13
NetR23_1: R23.1 S3..12
NetR24_1: R24.1 S3..11
NetR25_1: R25.1 S3..10
NetR26_1: R26.1 S3..9
NetR40_1: R40.1 SCHMITT.2 | length 4
  Bottom Layer w0.7: SCHMITT.2 92.71,184.5 R40.1
NetR44_2: R44.2 R45.1 U8.5
NetR46_1: R46.1 T2.1
NetR47_2: R47.2 T2.2 U5.1 U6.1
NetU5_3: U5.3 U5.4
NetU6_3: U6.3 U6.4
OE_ADC: ADC.9 OE.1 R9.2
OUT_COMP: COMP.7 R6.1 R40.2 R42.1 | length 8
  Bottom Layer w0.7: R6.1 105.25,184.59 R40.2 107.128,184.5 107.29,184.338 107.29,184.212 108.432,183.07 COMP.7@108.75,183.07
SH_CONTROL: FPGA.5 S/H.8
SH_IN: PUENTE_FAA.2 S/H.3
SH_OUT: ADC.26 R39.1 S/H.5
START/EOC: ADC.6 ADC.7 ADC.22 S_START.1 U2.11
VCC_3.3: C18.1 J5.3 R6.2 R17.2 R41.3 R46.2 S3..1 S3..2 S3..3 S3..4 S3..5 S3..6 S3..7 S3..8 U4.3
VCC_5: ADC.11 ADC.12 C14.1 C16.1 C17.2 C24.1 C25.2 C26.1 D11.2 D12.2 D13.2 DZ10.2 FPGA_ALIM.1 OE.2 R18.2 R35.2 R47.1 S_START.3 U1.20 U2.20 U3.3 U5.7 U6.7
VCC_10: ALIMENTACION.3 C1.1 C3.2 C5.1 C7.1 C9.1 C11.2 C13.1 C15.1 COMP.8 DAC1.13 DAC2.13 R4.2 R10.1 S/H.4 TRANSIMPEDANCIA.8 U3.1 U4.1 U8.8 | length 32.4
  Bottom Layer w0.7: DAC1.13 101.96,166.71 R4.2 104,170.352 104.8,171.152 104.8,171.389 105.4,171.989 105.4,172.9 105.5,173 107.895,175.395 C3.2 111.92,175.04 C1.1 ; COMP.8 111.96,177.42 C1.1 ; TRANSIMPEDANCIA.8 112.19,174.77 C1.1
VEE_5: C19.1 C20.1 C23.1 D14.1 DZ11.1 R14.2 R14.3 R36.2 U5.2 U6.2 U7.3
VEE_10: ALIMENTACION.1 C2.2 C4.1 C6.1 C10.2 C12.2 C21.1 C22.2 DAC1.3 DAC2.3 S/H.1 U7.2 U8.4 | length 14.2
  Bottom Layer w0.7: C2.2 88.79,169.25 DAC1.3 93.5,169.25 95.21,170.96 C4.1
pads on no net: COMP.5 COMP.6 FPGA.1 S/H.2 S_START.2 S_START.4

## Text inside footprints (layer, text, board x,y; h text height)
C18: Top Overlay "+" at 15.668,135.698 h1.02 r270
C22: Top Overlay "+" at 15.832,76.052 h1.02 r90